# EAGLE board SparkFun_TEMT6000_Breakout-Panel-v12 (EAGLE 7.4.0), part 1 of 2
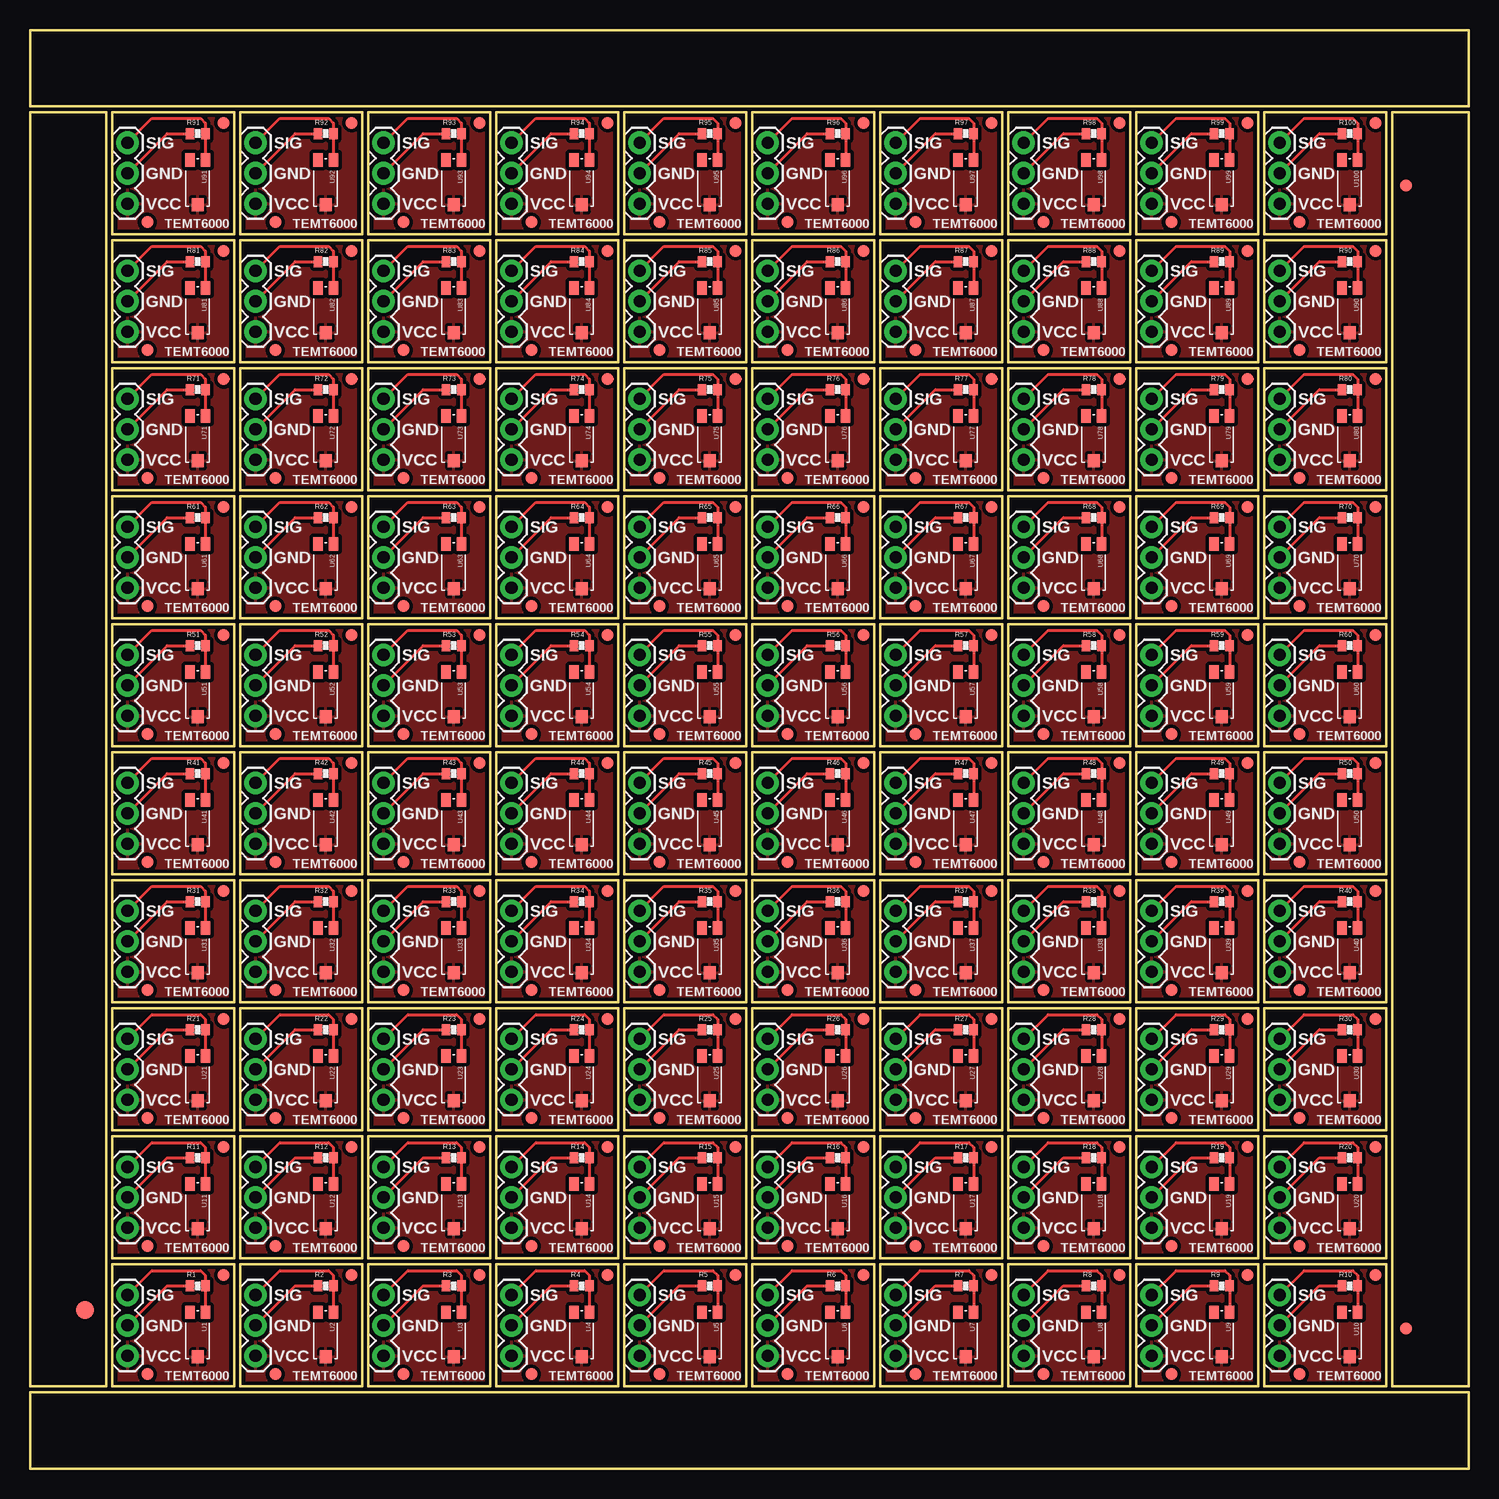
[diagram p0: board, top side]
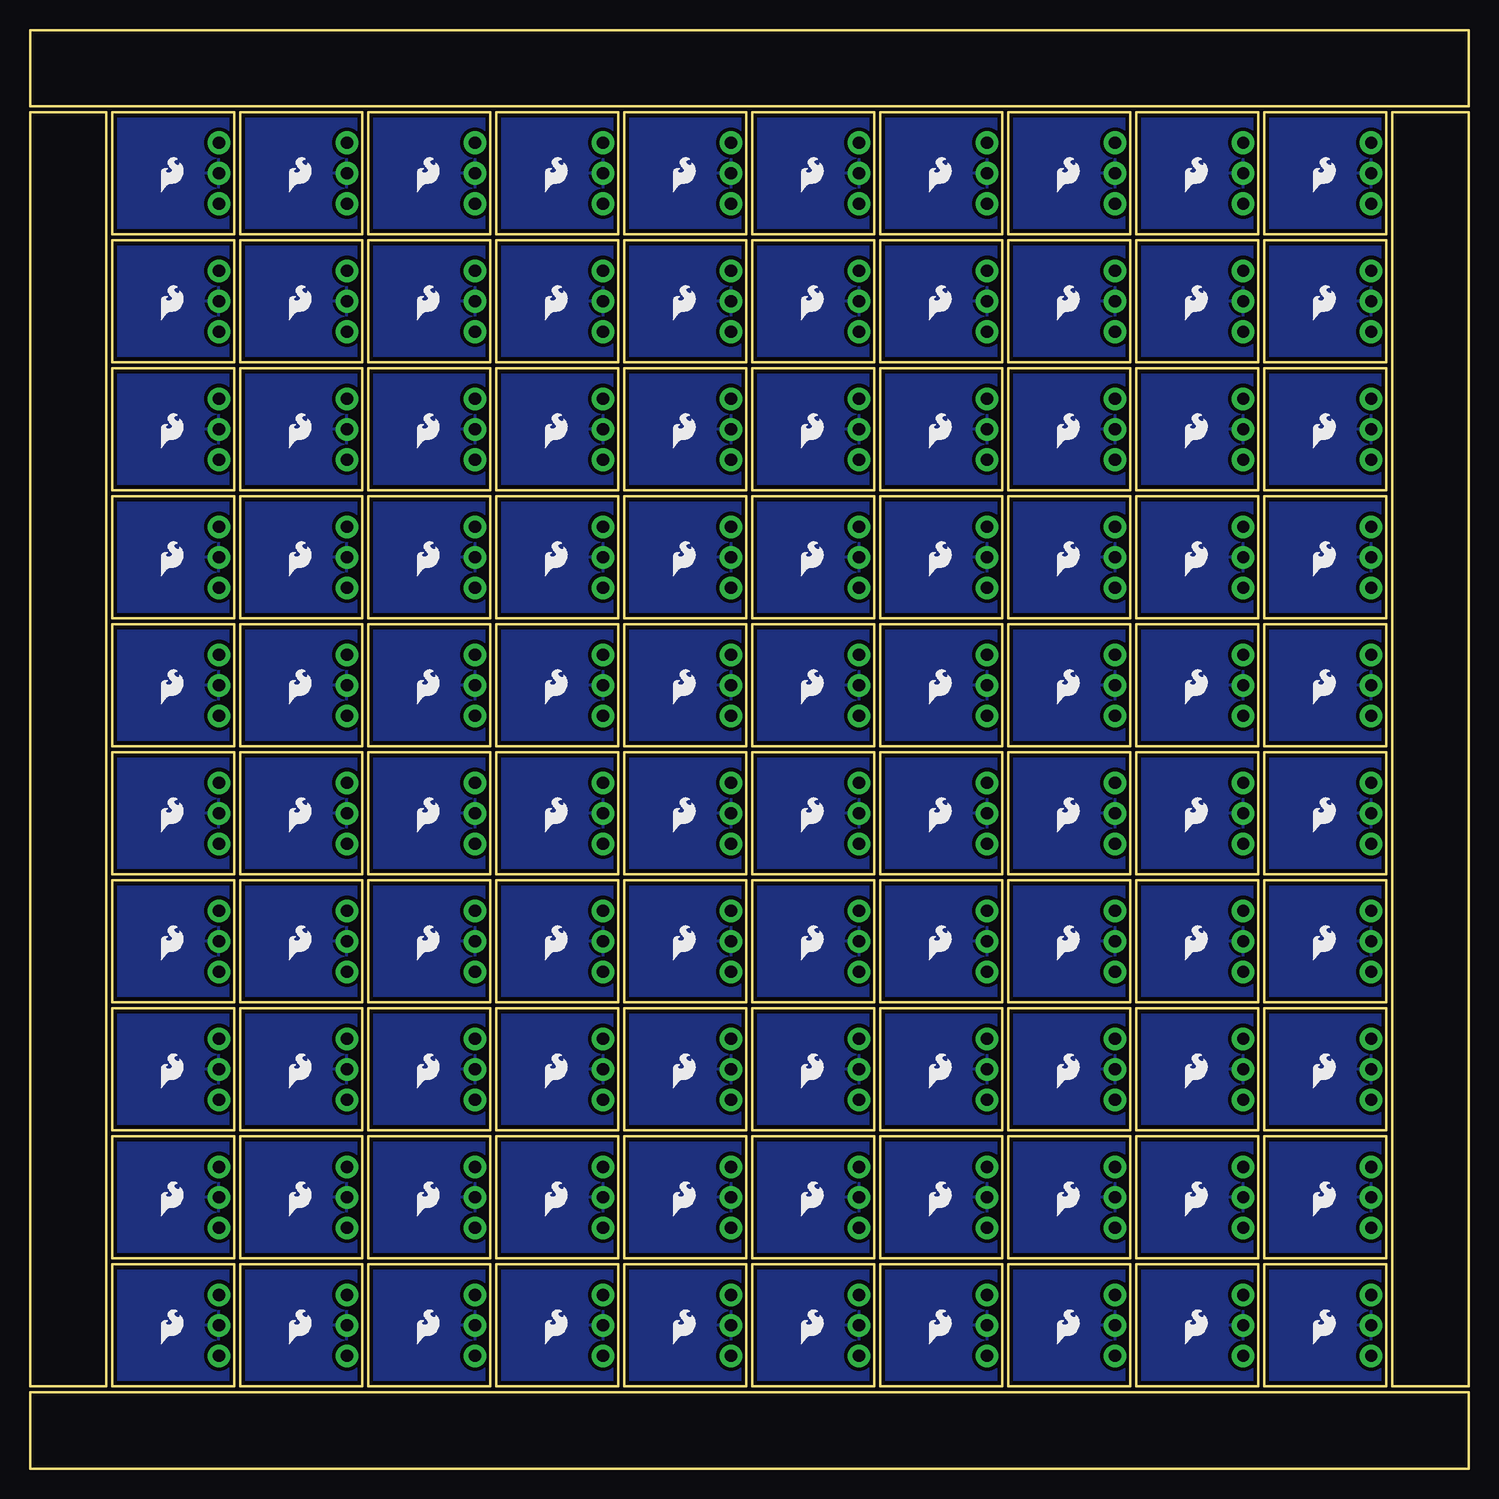
[diagram p1: board, bottom side, seen from below]

Size 119.89 x 119.89 mm. Coordinates in mm from the lower left corner, seen from the top.
Outline: 424 segments
Copper layers (1*16): Top 0.035mm / dielectric 1.5mm / Bottom 0.035mm
Design rules "SparkFun": minimum track width 8mil, minimum drill 20mil, track to track 8mil, track to pad 8mil, pad to pad 8mil, via to via 8mil, smd to smd 8mil, copper to edge 10mil, drill to drill 8mil, minimum pad ring 12mil, minimum via ring 10mil, stop-mask expansion 4mil, vias tented up to drill 20mil, thermal gap 10mil

## Footprints (pad centres in the part's own frame; a part is rotated, then mirrored left to right if it is on the bottom)
FIDUCIAL-1X2 = smd 1 x 1: 1 0,0
FIDUCIAL-1.5X3 = smd 1.5 x 1.5: 1 0,0
1X03 = drill 1.016 pad 1.88: 1 0,0; 2 2.54,0; 3 5.08,0
0402-RES = smd 0.7 x 0.9: 1 -0.65,0; 2 0.65,0
TEMT6000-SEN = smd 1.1 x 0.8: BASE -1.87,-0.65; EMITTER -1.87,0.65 | smd 1.1 x 1: COLLECTOR 1.86,0.01

## Placement (x,y rotation side)
E$1  [FIDUCIAL-1X2]  16.13,16.13 0 top
E$2  [FIDUCIAL-1X2]  9.78,7.87 0 top
E$3  [FIDUCIAL-1X2]  26.8,16.13 0 top
E$4  [FIDUCIAL-1X2]  20.45,7.87 0 top
E$5  [FIDUCIAL-1X2]  37.47,16.13 0 top
E$6  [FIDUCIAL-1X2]  31.11,7.87 0 top
E$7  [FIDUCIAL-1X2]  48.13,16.13 0 top
E$8  [FIDUCIAL-1X2]  41.78,7.87 0 top
E$9  [FIDUCIAL-1X2]  58.8,16.13 0 top
E$10  [FIDUCIAL-1X2]  52.45,7.87 0 top
E$11  [FIDUCIAL-1X2]  69.47,16.13 0 top
E$12  [FIDUCIAL-1X2]  63.12,7.87 0 top
E$13  [FIDUCIAL-1X2]  80.14,16.13 0 top
E$14  [FIDUCIAL-1X2]  73.79,7.87 0 top
E$15  [FIDUCIAL-1X2]  90.81,16.13 0 top
E$16  [FIDUCIAL-1X2]  84.45,7.87 0 top
E$17  [FIDUCIAL-1X2]  101.47,16.13 0 top
E$18  [FIDUCIAL-1X2]  95.12,7.87 0 top
E$19  [FIDUCIAL-1X2]  112.14,16.13 0 top
E$20  [FIDUCIAL-1X2]  105.79,7.87 0 top
E$21  [FIDUCIAL-1X2]  16.13,26.8 0 top
E$22  [FIDUCIAL-1X2]  9.78,18.54 0 top
E$23  [FIDUCIAL-1X2]  26.8,26.8 0 top
E$24  [FIDUCIAL-1X2]  20.45,18.54 0 top
E$25  [FIDUCIAL-1X2]  37.47,26.8 0 top
E$26  [FIDUCIAL-1X2]  31.11,18.54 0 top
E$27  [FIDUCIAL-1X2]  48.13,26.8 0 top
E$28  [FIDUCIAL-1X2]  41.78,18.54 0 top
E$29  [FIDUCIAL-1X2]  58.8,26.8 0 top
E$30  [FIDUCIAL-1X2]  52.45,18.54 0 top
E$31  [FIDUCIAL-1X2]  69.47,26.8 0 top
E$32  [FIDUCIAL-1X2]  63.12,18.54 0 top
E$33  [FIDUCIAL-1X2]  80.14,26.8 0 top
E$34  [FIDUCIAL-1X2]  73.79,18.54 0 top
E$35  [FIDUCIAL-1X2]  90.81,26.8 0 top
E$36  [FIDUCIAL-1X2]  84.45,18.54 0 top
E$37  [FIDUCIAL-1X2]  101.47,26.8 0 top
E$38  [FIDUCIAL-1X2]  95.12,18.54 0 top
E$39  [FIDUCIAL-1X2]  112.14,26.8 0 top
E$40  [FIDUCIAL-1X2]  105.79,18.54 0 top
E$41  [FIDUCIAL-1X2]  16.13,37.47 0 top
E$42  [FIDUCIAL-1X2]  9.78,29.21 0 top
E$43  [FIDUCIAL-1X2]  26.8,37.47 0 top
E$44  [FIDUCIAL-1X2]  20.45,29.21 0 top
E$45  [FIDUCIAL-1X2]  37.47,37.47 0 top
E$46  [FIDUCIAL-1X2]  31.11,29.21 0 top
E$47  [FIDUCIAL-1X2]  48.13,37.47 0 top
E$48  [FIDUCIAL-1X2]  41.78,29.21 0 top
E$49  [FIDUCIAL-1X2]  58.8,37.47 0 top
E$50  [FIDUCIAL-1X2]  52.45,29.21 0 top
E$51  [FIDUCIAL-1X2]  69.47,37.47 0 top
E$52  [FIDUCIAL-1X2]  63.12,29.21 0 top
E$53  [FIDUCIAL-1X2]  80.14,37.47 0 top
E$54  [FIDUCIAL-1X2]  73.79,29.21 0 top
E$55  [FIDUCIAL-1X2]  90.81,37.47 0 top
E$56  [FIDUCIAL-1X2]  84.45,29.21 0 top
E$57  [FIDUCIAL-1X2]  101.47,37.47 0 top
E$58  [FIDUCIAL-1X2]  95.12,29.21 0 top
E$59  [FIDUCIAL-1X2]  112.14,37.47 0 top
E$60  [FIDUCIAL-1X2]  105.79,29.21 0 top
E$61  [FIDUCIAL-1X2]  16.13,48.13 0 top
E$62  [FIDUCIAL-1X2]  9.78,39.88 0 top
E$63  [FIDUCIAL-1X2]  26.8,48.13 0 top
E$64  [FIDUCIAL-1X2]  20.45,39.88 0 top
E$65  [FIDUCIAL-1X2]  37.47,48.13 0 top
E$66  [FIDUCIAL-1X2]  31.11,39.88 0 top
E$67  [FIDUCIAL-1X2]  48.13,48.13 0 top
E$68  [FIDUCIAL-1X2]  41.78,39.88 0 top
E$69  [FIDUCIAL-1X2]  58.8,48.13 0 top
E$70  [FIDUCIAL-1X2]  52.45,39.88 0 top
E$71  [FIDUCIAL-1X2]  69.47,48.13 0 top
E$72  [FIDUCIAL-1X2]  63.12,39.88 0 top
E$73  [FIDUCIAL-1X2]  80.14,48.13 0 top
E$74  [FIDUCIAL-1X2]  73.79,39.88 0 top
E$75  [FIDUCIAL-1X2]  90.81,48.13 0 top
E$76  [FIDUCIAL-1X2]  84.45,39.88 0 top
E$77  [FIDUCIAL-1X2]  101.47,48.13 0 top
E$78  [FIDUCIAL-1X2]  95.12,39.88 0 top
E$79  [FIDUCIAL-1X2]  112.14,48.13 0 top
E$80  [FIDUCIAL-1X2]  105.79,39.88 0 top
E$81  [FIDUCIAL-1X2]  16.13,58.8 0 top
E$82  [FIDUCIAL-1X2]  9.78,50.55 0 top
E$83  [FIDUCIAL-1X2]  26.8,58.8 0 top
E$84  [FIDUCIAL-1X2]  20.45,50.55 0 top
E$85  [FIDUCIAL-1X2]  37.47,58.8 0 top
E$86  [FIDUCIAL-1X2]  31.11,50.55 0 top
E$87  [FIDUCIAL-1X2]  48.13,58.8 0 top
E$88  [FIDUCIAL-1X2]  41.78,50.55 0 top
E$89  [FIDUCIAL-1X2]  58.8,58.8 0 top
E$90  [FIDUCIAL-1X2]  52.45,50.55 0 top
E$91  [FIDUCIAL-1X2]  69.47,58.8 0 top
E$92  [FIDUCIAL-1X2]  63.12,50.55 0 top
E$93  [FIDUCIAL-1X2]  80.14,58.8 0 top
E$94  [FIDUCIAL-1X2]  73.79,50.55 0 top
E$95  [FIDUCIAL-1X2]  90.81,58.8 0 top
E$96  [FIDUCIAL-1X2]  84.45,50.55 0 top
E$97  [FIDUCIAL-1X2]  101.47,58.8 0 top
E$98  [FIDUCIAL-1X2]  95.12,50.55 0 top
E$99  [FIDUCIAL-1X2]  112.14,58.8 0 top
E$100  [FIDUCIAL-1X2]  105.79,50.55 0 top
E$101  [FIDUCIAL-1X2]  16.13,69.47 0 top
E$102  [FIDUCIAL-1X2]  9.78,61.21 0 top
E$103  [FIDUCIAL-1X2]  26.8,69.47 0 top
E$104  [FIDUCIAL-1X2]  20.45,61.21 0 top
E$105  [FIDUCIAL-1X2]  37.47,69.47 0 top
E$106  [FIDUCIAL-1X2]  31.11,61.21 0 top
E$107  [FIDUCIAL-1X2]  48.13,69.47 0 top
E$108  [FIDUCIAL-1X2]  41.78,61.21 0 top
E$109  [FIDUCIAL-1X2]  58.8,69.47 0 top
E$110  [FIDUCIAL-1X2]  52.45,61.21 0 top
E$111  [FIDUCIAL-1X2]  69.47,69.47 0 top
E$112  [FIDUCIAL-1X2]  63.12,61.21 0 top
E$113  [FIDUCIAL-1X2]  80.14,69.47 0 top
E$114  [FIDUCIAL-1X2]  73.79,61.21 0 top
E$115  [FIDUCIAL-1X2]  90.81,69.47 0 top
E$116  [FIDUCIAL-1X2]  84.45,61.21 0 top
E$117  [FIDUCIAL-1X2]  101.47,69.47 0 top
E$118  [FIDUCIAL-1X2]  95.12,61.21 0 top
E$119  [FIDUCIAL-1X2]  112.14,69.47 0 top
E$120  [FIDUCIAL-1X2]  105.79,61.21 0 top
E$121  [FIDUCIAL-1X2]  16.13,80.14 0 top
E$122  [FIDUCIAL-1X2]  9.78,71.88 0 top
E$123  [FIDUCIAL-1X2]  26.8,80.14 0 top
E$124  [FIDUCIAL-1X2]  20.45,71.88 0 top
E$125  [FIDUCIAL-1X2]  37.47,80.14 0 top
E$126  [FIDUCIAL-1X2]  31.11,71.88 0 top
E$127  [FIDUCIAL-1X2]  48.13,80.14 0 top
E$128  [FIDUCIAL-1X2]  41.78,71.88 0 top
E$129  [FIDUCIAL-1X2]  58.8,80.14 0 top
E$130  [FIDUCIAL-1X2]  52.45,71.88 0 top
E$131  [FIDUCIAL-1X2]  69.47,80.14 0 top
E$132  [FIDUCIAL-1X2]  63.12,71.88 0 top
E$133  [FIDUCIAL-1X2]  80.14,80.14 0 top
E$134  [FIDUCIAL-1X2]  73.79,71.88 0 top
E$135  [FIDUCIAL-1X2]  90.81,80.14 0 top
E$136  [FIDUCIAL-1X2]  84.45,71.88 0 top
E$137  [FIDUCIAL-1X2]  101.47,80.14 0 top
E$138  [FIDUCIAL-1X2]  95.12,71.88 0 top
E$139  [FIDUCIAL-1X2]  112.14,80.14 0 top
E$140  [FIDUCIAL-1X2]  105.79,71.88 0 top
E$141  [FIDUCIAL-1X2]  16.13,90.81 0 top
E$142  [FIDUCIAL-1X2]  9.78,82.55 0 top
E$143  [FIDUCIAL-1X2]  26.8,90.81 0 top
E$144  [FIDUCIAL-1X2]  20.45,82.55 0 top
E$145  [FIDUCIAL-1X2]  37.47,90.81 0 top
E$146  [FIDUCIAL-1X2]  31.11,82.55 0 top
E$147  [FIDUCIAL-1X2]  48.13,90.81 0 top
E$148  [FIDUCIAL-1X2]  41.78,82.55 0 top
E$149  [FIDUCIAL-1X2]  58.8,90.81 0 top
E$150  [FIDUCIAL-1X2]  52.45,82.55 0 top
E$151  [FIDUCIAL-1X2]  69.47,90.81 0 top
E$152  [FIDUCIAL-1X2]  63.12,82.55 0 top
E$153  [FIDUCIAL-1X2]  80.14,90.81 0 top
E$154  [FIDUCIAL-1X2]  73.79,82.55 0 top
E$155  [FIDUCIAL-1X2]  90.81,90.81 0 top
E$156  [FIDUCIAL-1X2]  84.45,82.55 0 top
E$157  [FIDUCIAL-1X2]  101.47,90.81 0 top
E$158  [FIDUCIAL-1X2]  95.12,82.55 0 top
E$159  [FIDUCIAL-1X2]  112.14,90.81 0 top
E$160  [FIDUCIAL-1X2]  105.79,82.55 0 top
E$161  [FIDUCIAL-1X2]  16.13,101.47 0 top
E$162  [FIDUCIAL-1X2]  9.78,93.22 0 top
E$163  [FIDUCIAL-1X2]  26.8,101.47 0 top
E$164  [FIDUCIAL-1X2]  20.45,93.22 0 top
E$165  [FIDUCIAL-1X2]  37.47,101.47 0 top
E$166  [FIDUCIAL-1X2]  31.11,93.22 0 top
E$167  [FIDUCIAL-1X2]  48.13,101.47 0 top
E$168  [FIDUCIAL-1X2]  41.78,93.22 0 top
E$169  [FIDUCIAL-1X2]  58.8,101.47 0 top
E$170  [FIDUCIAL-1X2]  52.45,93.22 0 top
E$171  [FIDUCIAL-1X2]  69.47,101.47 0 top
E$172  [FIDUCIAL-1X2]  63.12,93.22 0 top
E$173  [FIDUCIAL-1X2]  80.14,101.47 0 top
E$174  [FIDUCIAL-1X2]  73.79,93.22 0 top
E$175  [FIDUCIAL-1X2]  90.81,101.47 0 top
E$176  [FIDUCIAL-1X2]  84.45,93.22 0 top
E$177  [FIDUCIAL-1X2]  101.47,101.47 0 top
E$178  [FIDUCIAL-1X2]  95.12,93.22 0 top
E$179  [FIDUCIAL-1X2]  112.14,101.47 0 top
E$180  [FIDUCIAL-1X2]  105.79,93.22 0 top
E$181  [FIDUCIAL-1X2]  16.13,112.14 0 top
E$182  [FIDUCIAL-1X2]  9.78,103.89 0 top
E$183  [FIDUCIAL-1X2]  26.8,112.14 0 top
E$184  [FIDUCIAL-1X2]  20.45,103.89 0 top
E$185  [FIDUCIAL-1X2]  37.47,112.14 0 top
E$186  [FIDUCIAL-1X2]  31.11,103.89 0 top
E$187  [FIDUCIAL-1X2]  48.13,112.14 0 top
E$188  [FIDUCIAL-1X2]  41.78,103.89 0 top
E$189  [FIDUCIAL-1X2]  58.8,112.14 0 top
E$190  [FIDUCIAL-1X2]  52.45,103.89 0 top
E$191  [FIDUCIAL-1X2]  69.47,112.14 0 top
E$192  [FIDUCIAL-1X2]  63.12,103.89 0 top
E$193  [FIDUCIAL-1X2]  80.14,112.14 0 top
E$194  [FIDUCIAL-1X2]  73.79,103.89 0 top
E$195  [FIDUCIAL-1X2]  90.81,112.14 0 top
E$196  [FIDUCIAL-1X2]  84.45,103.89 0 top
E$197  [FIDUCIAL-1X2]  101.47,112.14 0 top
E$198  [FIDUCIAL-1X2]  95.12,103.89 0 top
E$199  [FIDUCIAL-1X2]  112.14,112.14 0 top
E$200  [FIDUCIAL-1X2]  105.79,103.89 0 top
E$201  [FIDUCIAL-1.5X3]  4.57,13.21 0 top
E$205  [FIDUCIAL-1X2]  114.68,11.68 0 top
E$206  [FIDUCIAL-1X2]  114.68,106.93 180 top
JP1  [1X03]  18.8,9.4 90 top
JP2  [1X03]  29.46,9.4 90 top
JP3  [1X03]  40.13,9.4 90 top
JP4  [1X03]  8.13,9.4 90 top
JP5  [1X03]  50.8,9.4 90 top
JP6  [1X03]  61.47,9.4 90 top
JP7  [1X03]  72.14,9.4 90 top
JP8  [1X03]  82.8,9.4 90 top
JP9  [1X03]  93.47,9.4 90 top
JP10  [1X03]  104.14,9.4 90 top
JP11  [1X03]  8.13,20.07 90 top
JP12  [1X03]  18.8,20.07 90 top
JP13  [1X03]  29.46,20.07 90 top
JP14  [1X03]  40.13,20.07 90 top
JP15  [1X03]  50.8,20.07 90 top
JP16  [1X03]  61.47,20.07 90 top
JP17  [1X03]  72.14,20.07 90 top
JP18  [1X03]  82.8,20.07 90 top
JP19  [1X03]  93.47,20.07 90 top
JP20  [1X03]  104.14,20.07 90 top
JP21  [1X03]  8.13,30.73 90 top
JP22  [1X03]  18.8,30.73 90 top
JP23  [1X03]  29.46,30.73 90 top
JP24  [1X03]  40.13,30.73 90 top
JP25  [1X03]  50.8,30.73 90 top
JP26  [1X03]  61.47,30.73 90 top
JP27  [1X03]  72.14,30.73 90 top
JP28  [1X03]  82.8,30.73 90 top
JP29  [1X03]  93.47,30.73 90 top
JP30  [1X03]  104.14,30.73 90 top
JP31  [1X03]  8.13,41.4 90 top
JP32  [1X03]  18.8,41.4 90 top
JP33  [1X03]  29.46,41.4 90 top
JP34  [1X03]  40.13,41.4 90 top
JP35  [1X03]  50.8,41.4 90 top
JP36  [1X03]  61.47,41.4 90 top
JP37  [1X03]  72.14,41.4 90 top
JP38  [1X03]  82.8,41.4 90 top
JP39  [1X03]  93.47,41.4 90 top
JP40  [1X03]  104.14,41.4 90 top
JP41  [1X03]  8.13,52.07 90 top
JP42  [1X03]  18.8,52.07 90 top
JP43  [1X03]  29.46,52.07 90 top
JP44  [1X03]  40.13,52.07 90 top
JP45  [1X03]  50.8,52.07 90 top
JP46  [1X03]  61.47,52.07 90 top
JP47  [1X03]  72.14,52.07 90 top
JP48  [1X03]  82.8,52.07 90 top
JP49  [1X03]  93.47,52.07 90 top
JP50  [1X03]  104.14,52.07 90 top
JP51  [1X03]  8.13,62.74 90 top
JP52  [1X03]  18.8,62.74 90 top
JP53  [1X03]  29.46,62.74 90 top
JP54  [1X03]  40.13,62.74 90 top
JP55  [1X03]  50.8,62.74 90 top
JP56  [1X03]  61.47,62.74 90 top
JP57  [1X03]  72.14,62.74 90 top
JP58  [1X03]  82.8,62.74 90 top
JP59  [1X03]  93.47,62.74 90 top
JP60  [1X03]  104.14,62.74 90 top
JP61  [1X03]  8.13,73.41 90 top
JP62  [1X03]  18.8,73.41 90 top
JP63  [1X03]  29.46,73.41 90 top
JP64  [1X03]  40.13,73.41 90 top
JP65  [1X03]  50.8,73.41 90 top
JP66  [1X03]  61.47,73.41 90 top
JP67  [1X03]  72.14,73.41 90 top
JP68  [1X03]  82.8,73.41 90 top
JP69  [1X03]  93.47,73.41 90 top
JP70  [1X03]  104.14,73.41 90 top
JP71  [1X03]  8.13,84.07 90 top
JP72  [1X03]  18.8,84.07 90 top
JP73  [1X03]  29.46,84.07 90 top
JP74  [1X03]  40.13,84.07 90 top
JP75  [1X03]  50.8,84.07 90 top
JP76  [1X03]  61.47,84.07 90 top
JP77  [1X03]  72.14,84.07 90 top
JP78  [1X03]  82.8,84.07 90 top
JP79  [1X03]  93.47,84.07 90 top
JP80  [1X03]  104.14,84.07 90 top
JP81  [1X03]  8.13,94.74 90 top
JP82  [1X03]  18.8,94.74 90 top
JP83  [1X03]  29.46,94.74 90 top
JP84  [1X03]  40.13,94.74 90 top
JP85  [1X03]  50.8,94.74 90 top
JP86  [1X03]  61.47,94.74 90 top
JP87  [1X03]  72.14,94.74 90 top
JP88  [1X03]  82.8,94.74 90 top
JP89  [1X03]  93.47,94.74 90 top
JP90  [1X03]  104.14,94.74 90 top
JP91  [1X03]  8.13,105.41 90 top
JP92  [1X03]  18.8,105.41 90 top
JP93  [1X03]  29.46,105.41 90 top
JP94  [1X03]  40.13,105.41 90 top
JP95  [1X03]  50.8,105.41 90 top
JP96  [1X03]  61.47,105.41 90 top
JP97  [1X03]  72.14,105.41 90 top
JP98  [1X03]  82.8,105.41 90 top
JP99  [1X03]  93.47,105.41 90 top
JP100  [1X03]  104.14,105.41 90 top
R1  10K  [0402-RES]  13.97,15.24 0 top
R2  10K  [0402-RES]  24.64,15.24 0 top
R3  10K  [0402-RES]  35.31,15.24 0 top
R4  10K  [0402-RES]  45.97,15.24 0 top
R5  10K  [0402-RES]  56.64,15.24 0 top
R6  10K  [0402-RES]  67.31,15.24 0 top
R7  10K  [0402-RES]  77.98,15.24 0 top
R8  10K  [0402-RES]  88.65,15.24 0 top
R9  10K  [0402-RES]  99.31,15.24 0 top
R10  10K  [0402-RES]  109.98,15.24 0 top
R11  10K  [0402-RES]  13.97,25.91 0 top
R12  10K  [0402-RES]  24.64,25.91 0 top
R13  10K  [0402-RES]  35.31,25.91 0 top
R14  10K  [0402-RES]  45.97,25.91 0 top
R15  10K  [0402-RES]  56.64,25.91 0 top
R16  10K  [0402-RES]  67.31,25.91 0 top
R17  10K  [0402-RES]  77.98,25.91 0 top
R18  10K  [0402-RES]  88.65,25.91 0 top
R19  10K  [0402-RES]  99.31,25.91 0 top
R20  10K  [0402-RES]  109.98,25.91 0 top
R21  10K  [0402-RES]  13.97,36.58 0 top
R22  10K  [0402-RES]  24.64,36.58 0 top
R23  10K  [0402-RES]  35.31,36.58 0 top
R24  10K  [0402-RES]  45.97,36.58 0 top
R25  10K  [0402-RES]  56.64,36.58 0 top
R26  10K  [0402-RES]  67.31,36.58 0 top
R27  10K  [0402-RES]  77.98,36.58 0 top
R28  10K  [0402-RES]  88.65,36.58 0 top
R29  10K  [0402-RES]  99.31,36.58 0 top
R30  10K  [0402-RES]  109.98,36.58 0 top
R31  10K  [0402-RES]  13.97,47.24 0 top
R32  10K  [0402-RES]  24.64,47.24 0 top
R33  10K  [0402-RES]  35.31,47.24 0 top
R34  10K  [0402-RES]  45.97,47.24 0 top
R35  10K  [0402-RES]  56.64,47.24 0 top
R36  10K  [0402-RES]  67.31,47.24 0 top
R37  10K  [0402-RES]  77.98,47.24 0 top
R38  10K  [0402-RES]  88.65,47.24 0 top
R39  10K  [0402-RES]  99.31,47.24 0 top
R40  10K  [0402-RES]  109.98,47.24 0 top
R41  10K  [0402-RES]  13.97,57.91 0 top
R42  10K  [0402-RES]  24.64,57.91 0 top
R43  10K  [0402-RES]  35.31,57.91 0 top
R44  10K  [0402-RES]  45.97,57.91 0 top
R45  10K  [0402-RES]  56.64,57.91 0 top
R46  10K  [0402-RES]  67.31,57.91 0 top
R47  10K  [0402-RES]  77.98,57.91 0 top
R48  10K  [0402-RES]  88.65,57.91 0 top
R49  10K  [0402-RES]  99.31,57.91 0 top
R50  10K  [0402-RES]  109.98,57.91 0 top
R51  10K  [0402-RES]  13.97,68.58 0 top
R52  10K  [0402-RES]  24.64,68.58 0 top
R53  10K  [0402-RES]  35.31,68.58 0 top
R54  10K  [0402-RES]  45.97,68.58 0 top
R55  10K  [0402-RES]  56.64,68.58 0 top
R56  10K  [0402-RES]  67.31,68.58 0 top
R57  10K  [0402-RES]  77.98,68.58 0 top
R58  10K  [0402-RES]  88.65,68.58 0 top
R59  10K  [0402-RES]  99.31,68.58 0 top
R60  10K  [0402-RES]  109.98,68.58 0 top
R61  10K  [0402-RES]  13.97,79.25 0 top
R62  10K  [0402-RES]  24.64,79.25 0 top
R63  10K  [0402-RES]  35.31,79.25 0 top
R64  10K  [0402-RES]  45.97,79.25 0 top
R65  10K  [0402-RES]  56.64,79.25 0 top
R66  10K  [0402-RES]  67.31,79.25 0 top
R67  10K  [0402-RES]  77.98,79.25 0 top
R68  10K  [0402-RES]  88.65,79.25 0 top
R69  10K  [0402-RES]  99.31,79.25 0 top
R70  10K  [0402-RES]  109.98,79.25 0 top
R71  10K  [0402-RES]  13.97,89.92 0 top
R72  10K  [0402-RES]  24.64,89.92 0 top
R73  10K  [0402-RES]  35.31,89.92 0 top
R74  10K  [0402-RES]  45.97,89.92 0 top
R75  10K  [0402-RES]  56.64,89.92 0 top
R76  10K  [0402-RES]  67.31,89.92 0 top
R77  10K  [0402-RES]  77.98,89.92 0 top
R78  10K  [0402-RES]  88.65,89.92 0 top
R79  10K  [0402-RES]  99.31,89.92 0 top
R80  10K  [0402-RES]  109.98,89.92 0 top
R81  10K  [0402-RES]  13.97,100.58 0 top
R82  10K  [0402-RES]  24.64,100.58 0 top
R83  10K  [0402-RES]  35.31,100.58 0 top
R84  10K  [0402-RES]  45.97,100.58 0 top
R85  10K  [0402-RES]  56.64,100.58 0 top
R86  10K  [0402-RES]  67.31,100.58 0 top
R87  10K  [0402-RES]  77.98,100.58 0 top
R88  10K  [0402-RES]  88.65,100.58 0 top
R89  10K  [0402-RES]  99.31,100.58 0 top
R90  10K  [0402-RES]  109.98,100.58 0 top
R91  10K  [0402-RES]  13.97,111.25 0 top
R92  10K  [0402-RES]  24.64,111.25 0 top
R93  10K  [0402-RES]  35.31,111.25 0 top
R94  10K  [0402-RES]  45.97,111.25 0 top
R95  10K  [0402-RES]  56.64,111.25 0 top
R96  10K  [0402-RES]  67.31,111.25 0 top
R97  10K  [0402-RES]  77.98,111.25 0 top
R98  10K  [0402-RES]  88.65,111.25 0 top
R99  10K  [0402-RES]  99.31,111.25 0 top
R100  10K  [0402-RES]  109.98,111.25 0 top
U1  TEMT6000  [TEMT6000-SEN]  13.97,11.18 270 top
U2  TEMT6000  [TEMT6000-SEN]  24.64,11.18 270 top
U3  TEMT6000  [TEMT6000-SEN]  35.31,11.18 270 top
U4  TEMT6000  [TEMT6000-SEN]  45.97,11.18 270 top
U5  TEMT6000  [TEMT6000-SEN]  56.64,11.18 270 top
U6  TEMT6000  [TEMT6000-SEN]  67.31,11.18 270 top
U7  TEMT6000  [TEMT6000-SEN]  77.98,11.18 270 top
U8  TEMT6000  [TEMT6000-SEN]  88.65,11.18 270 top
U9  TEMT6000  [TEMT6000-SEN]  99.31,11.18 270 top
U10  TEMT6000  [TEMT6000-SEN]  109.98,11.18 270 top
U11  TEMT6000  [TEMT6000-SEN]  13.97,21.84 270 top
U12  TEMT6000  [TEMT6000-SEN]  24.64,21.84 270 top
U13  TEMT6000  [TEMT6000-SEN]  35.31,21.84 270 top
U14  TEMT6000  [TEMT6000-SEN]  45.97,21.84 270 top
U15  TEMT6000  [TEMT6000-SEN]  56.64,21.84 270 top
U16  TEMT6000  [TEMT6000-SEN]  67.31,21.84 270 top
U17  TEMT6000  [TEMT6000-SEN]  77.98,21.84 270 top
U18  TEMT6000  [TEMT6000-SEN]  88.65,21.84 270 top
U19  TEMT6000  [TEMT6000-SEN]  99.31,21.84 270 top
U20  TEMT6000  [TEMT6000-SEN]  109.98,21.84 270 top
U21  TEMT6000  [TEMT6000-SEN]  13.97,32.51 270 top
U22  TEMT6000  [TEMT6000-SEN]  24.64,32.51 270 top
U23  TEMT6000  [TEMT6000-SEN]  35.31,32.51 270 top
U24  TEMT6000  [TEMT6000-SEN]  45.97,32.51 270 top
U25  TEMT6000  [TEMT6000-SEN]  56.64,32.51 270 top
U26  TEMT6000  [TEMT6000-SEN]  67.31,32.51 270 top
U27  TEMT6000  [TEMT6000-SEN]  77.98,32.51 270 top
U28  TEMT6000  [TEMT6000-SEN]  88.65,32.51 270 top
U29  TEMT6000  [TEMT6000-SEN]  99.31,32.51 270 top
U30  TEMT6000  [TEMT6000-SEN]  109.98,32.51 270 top
U31  TEMT6000  [TEMT6000-SEN]  13.97,43.18 270 top
U32  TEMT6000  [TEMT6000-SEN]  24.64,43.18 270 top
U33  TEMT6000  [TEMT6000-SEN]  35.31,43.18 270 top
U34  TEMT6000  [TEMT6000-SEN]  45.97,43.18 270 top
U35  TEMT6000  [TEMT6000-SEN]  56.64,43.18 270 top
U36  TEMT6000  [TEMT6000-SEN]  67.31,43.18 270 top
U37  TEMT6000  [TEMT6000-SEN]  77.98,43.18 270 top
U38  TEMT6000  [TEMT6000-SEN]  88.65,43.18 270 top
U39  TEMT6000  [TEMT6000-SEN]  99.31,43.18 270 top
U40  TEMT6000  [TEMT6000-SEN]  109.98,43.18 270 top
U41  TEMT6000  [TEMT6000-SEN]  13.97,53.85 270 top
U42  TEMT6000  [TEMT6000-SEN]  24.64,53.85 270 top
U43  TEMT6000  [TEMT6000-SEN]  35.31,53.85 270 top
U44  TEMT6000  [TEMT6000-SEN]  45.97,53.85 270 top
U45  TEMT6000  [TEMT6000-SEN]  56.64,53.85 270 top
U46  TEMT6000  [TEMT6000-SEN]  67.31,53.85 270 top
U47  TEMT6000  [TEMT6000-SEN]  77.98,53.85 270 top
U48  TEMT6000  [TEMT6000-SEN]  88.65,53.85 270 top
U49  TEMT6000  [TEMT6000-SEN]  99.31,53.85 270 top
U50  TEMT6000  [TEMT6000-SEN]  109.98,53.85 270 top
U51  TEMT6000  [TEMT6000-SEN]  13.97,64.52 270 top
U52  TEMT6000  [TEMT6000-SEN]  24.64,64.52 270 top
U53  TEMT6000  [TEMT6000-SEN]  35.31,64.52 270 top
U54  TEMT6000  [TEMT6000-SEN]  45.97,64.52 270 top
U55  TEMT6000  [TEMT6000-SEN]  56.64,64.52 270 top
U56  TEMT6000  [TEMT6000-SEN]  67.31,64.52 270 top
U57  TEMT6000  [TEMT6000-SEN]  77.98,64.52 270 top
U58  TEMT6000  [TEMT6000-SEN]  88.65,64.52 270 top
U59  TEMT6000  [TEMT6000-SEN]  99.31,64.52 270 top
U60  TEMT6000  [TEMT6000-SEN]  109.98,64.52 270 top
U61  TEMT6000  [TEMT6000-SEN]  13.97,75.18 270 top
U62  TEMT6000  [TEMT6000-SEN]  24.64,75.18 270 top
U63  TEMT6000  [TEMT6000-SEN]  35.31,75.18 270 top
U64  TEMT6000  [TEMT6000-SEN]  45.97,75.18 270 top
U65  TEMT6000  [TEMT6000-SEN]  56.64,75.18 270 top
U66  TEMT6000  [TEMT6000-SEN]  67.31,75.18 270 top
U67  TEMT6000  [TEMT6000-SEN]  77.98,75.18 270 top
U68  TEMT6000  [TEMT6000-SEN]  88.65,75.18 270 top
U69  TEMT6000  [TEMT6000-SEN]  99.31,75.18 270 top
U70  TEMT6000  [TEMT6000-SEN]  109.98,75.18 270 top
U71  TEMT6000  [TEMT6000-SEN]  13.97,85.85 270 top
U72  TEMT6000  [TEMT6000-SEN]  24.64,85.85 270 top
U73  TEMT6000  [TEMT6000-SEN]  35.31,85.85 270 top
U74  TEMT6000  [TEMT6000-SEN]  45.97,85.85 270 top
U75  TEMT6000  [TEMT6000-SEN]  56.64,85.85 270 top
U76  TEMT6000  [TEMT6000-SEN]  67.31,85.85 270 top
U77  TEMT6000  [TEMT6000-SEN]  77.98,85.85 270 top
U78  TEMT6000  [TEMT6000-SEN]  88.65,85.85 270 top
U79  TEMT6000  [TEMT6000-SEN]  99.31,85.85 270 top
U80  TEMT6000  [TEMT6000-SEN]  109.98,85.85 270 top
U81  TEMT6000  [TEMT6000-SEN]  13.97,96.52 270 top
U82  TEMT6000  [TEMT6000-SEN]  24.64,96.52 270 top
U83  TEMT6000  [TEMT6000-SEN]  35.31,96.52 270 top
U84  TEMT6000  [TEMT6000-SEN]  45.97,96.52 270 top
U85  TEMT6000  [TEMT6000-SEN]  56.64,96.52 270 top
U86  TEMT6000  [TEMT6000-SEN]  67.31,96.52 270 top
U87  TEMT6000  [TEMT6000-SEN]  77.98,96.52 270 top
U88  TEMT6000  [TEMT6000-SEN]  88.65,96.52 270 top
U89  TEMT6000  [TEMT6000-SEN]  99.31,96.52 270 top
U90  TEMT6000  [TEMT6000-SEN]  109.98,96.52 270 top
U91  TEMT6000  [TEMT6000-SEN]  13.97,107.19 270 top
U92  TEMT6000  [TEMT6000-SEN]  24.64,107.19 270 top
U93  TEMT6000  [TEMT6000-SEN]  35.31,107.19 270 top
U94  TEMT6000  [TEMT6000-SEN]  45.97,107.19 270 top
U95  TEMT6000  [TEMT6000-SEN]  56.64,107.19 270 top
U96  TEMT6000  [TEMT6000-SEN]  67.31,107.19 270 top
U97  TEMT6000  [TEMT6000-SEN]  77.98,107.19 270 top
U98  TEMT6000  [TEMT6000-SEN]  88.65,107.19 270 top
U99  TEMT6000  [TEMT6000-SEN]  99.31,107.19 270 top
U100  TEMT6000  [TEMT6000-SEN]  109.98,107.19 270 top
U$1  LOGO-SFESK  [SFE-LOGO-FLAME]  12.95,10.41 0 bottom
U$2  LOGO-SFESK  [SFE-LOGO-FLAME]  23.62,10.41 0 bottom
U$3  LOGO-SFESK  [SFE-LOGO-FLAME]  34.29,10.41 0 bottom
U$4  LOGO-SFESK  [SFE-LOGO-FLAME]  44.96,10.41 0 bottom
U$5  LOGO-SFESK  [SFE-LOGO-FLAME]  55.63,10.41 0 bottom
U$6  LOGO-SFESK  [SFE-LOGO-FLAME]  66.29,10.41 0 bottom
U$7  LOGO-SFESK  [SFE-LOGO-FLAME]  76.96,10.41 0 bottom
U$8  LOGO-SFESK  [SFE-LOGO-FLAME]  87.63,10.41 0 bottom
U$9  LOGO-SFESK  [SFE-LOGO-FLAME]  98.3,10.41 0 bottom
U$10  LOGO-SFESK  [SFE-LOGO-FLAME]  108.97,10.41 0 bottom
U$11  LOGO-SFESK  [SFE-LOGO-FLAME]  12.95,21.08 0 bottom
U$12  LOGO-SFESK  [SFE-LOGO-FLAME]  23.62,21.08 0 bottom
U$13  LOGO-SFESK  [SFE-LOGO-FLAME]  34.29,21.08 0 bottom
U$14  LOGO-SFESK  [SFE-LOGO-FLAME]  44.96,21.08 0 bottom
U$15  LOGO-SFESK  [SFE-LOGO-FLAME]  55.63,21.08 0 bottom
U$16  LOGO-SFESK  [SFE-LOGO-FLAME]  66.29,21.08 0 bottom
U$17  LOGO-SFESK  [SFE-LOGO-FLAME]  76.96,21.08 0 bottom
U$18  LOGO-SFESK  [SFE-LOGO-FLAME]  87.63,21.08 0 bottom
U$19  LOGO-SFESK  [SFE-LOGO-FLAME]  98.3,21.08 0 bottom
U$20  LOGO-SFESK  [SFE-LOGO-FLAME]  108.97,21.08 0 bottom
U$21  LOGO-SFESK  [SFE-LOGO-FLAME]  12.95,31.75 0 bottom
U$22  LOGO-SFESK  [SFE-LOGO-FLAME]  23.62,31.75 0 bottom
U$23  LOGO-SFESK  [SFE-LOGO-FLAME]  34.29,31.75 0 bottom
U$24  LOGO-SFESK  [SFE-LOGO-FLAME]  44.96,31.75 0 bottom
U$25  LOGO-SFESK  [SFE-LOGO-FLAME]  55.63,31.75 0 bottom
U$26  LOGO-SFESK  [SFE-LOGO-FLAME]  66.29,31.75 0 bottom
U$27  LOGO-SFESK  [SFE-LOGO-FLAME]  76.96,31.75 0 bottom
U$28  LOGO-SFESK  [SFE-LOGO-FLAME]  87.63,31.75 0 bottom
U$29  LOGO-SFESK  [SFE-LOGO-FLAME]  98.3,31.75 0 bottom
U$30  LOGO-SFESK  [SFE-LOGO-FLAME]  108.97,31.75 0 bottom
U$31  LOGO-SFESK  [SFE-LOGO-FLAME]  12.95,42.42 0 bottom
U$32  LOGO-SFESK  [SFE-LOGO-FLAME]  23.62,42.42 0 bottom
U$33  LOGO-SFESK  [SFE-LOGO-FLAME]  34.29,42.42 0 bottom
U$34  LOGO-SFESK  [SFE-LOGO-FLAME]  44.96,42.42 0 bottom
U$35  LOGO-SFESK  [SFE-LOGO-FLAME]  55.63,42.42 0 bottom
U$36  LOGO-SFESK  [SFE-LOGO-FLAME]  66.29,42.42 0 bottom
U$37  LOGO-SFESK  [SFE-LOGO-FLAME]  76.96,42.42 0 bottom
U$38  LOGO-SFESK  [SFE-LOGO-FLAME]  87.63,42.42 0 bottom
U$39  LOGO-SFESK  [SFE-LOGO-FLAME]  98.3,42.42 0 bottom
U$40  LOGO-SFESK  [SFE-LOGO-FLAME]  108.97,42.42 0 bottom
U$41  LOGO-SFESK  [SFE-LOGO-FLAME]  12.95,53.09 0 bottom
U$42  LOGO-SFESK  [SFE-LOGO-FLAME]  23.62,53.09 0 bottom
U$43  LOGO-SFESK  [SFE-LOGO-FLAME]  34.29,53.09 0 bottom
U$44  LOGO-SFESK  [SFE-LOGO-FLAME]  44.96,53.09 0 bottom
U$45  LOGO-SFESK  [SFE-LOGO-FLAME]  55.63,53.09 0 bottom
U$46  LOGO-SFESK  [SFE-LOGO-FLAME]  66.29,53.09 0 bottom
U$47  LOGO-SFESK  [SFE-LOGO-FLAME]  76.96,53.09 0 bottom
U$48  LOGO-SFESK  [SFE-LOGO-FLAME]  87.63,53.09 0 bottom
U$49  LOGO-SFESK  [SFE-LOGO-FLAME]  98.3,53.09 0 bottom
U$50  LOGO-SFESK  [SFE-LOGO-FLAME]  108.97,53.09 0 bottom
U$51  LOGO-SFESK  [SFE-LOGO-FLAME]  12.95,63.75 0 bottom
U$52  LOGO-SFESK  [SFE-LOGO-FLAME]  23.62,63.75 0 bottom
U$53  LOGO-SFESK  [SFE-LOGO-FLAME]  34.29,63.75 0 bottom
U$54  LOGO-SFESK  [SFE-LOGO-FLAME]  44.96,63.75 0 bottom
U$55  LOGO-SFESK  [SFE-LOGO-FLAME]  55.63,63.75 0 bottom
U$56  LOGO-SFESK  [SFE-LOGO-FLAME]  66.29,63.75 0 bottom
U$57  LOGO-SFESK  [SFE-LOGO-FLAME]  76.96,63.75 0 bottom
U$58  LOGO-SFESK  [SFE-LOGO-FLAME]  87.63,63.75 0 bottom
U$59  LOGO-SFESK  [SFE-LOGO-FLAME]  98.3,63.75 0 bottom
U$60  LOGO-SFESK  [SFE-LOGO-FLAME]  108.97,63.75 0 bottom
U$61  LOGO-SFESK  [SFE-LOGO-FLAME]  12.95,74.42 0 bottom
U$62  LOGO-SFESK  [SFE-LOGO-FLAME]  23.62,74.42 0 bottom
U$63  LOGO-SFESK  [SFE-LOGO-FLAME]  34.29,74.42 0 bottom
U$64  LOGO-SFESK  [SFE-LOGO-FLAME]  44.96,74.42 0 bottom
U$65  LOGO-SFESK  [SFE-LOGO-FLAME]  55.63,74.42 0 bottom
U$66  LOGO-SFESK  [SFE-LOGO-FLAME]  66.29,74.42 0 bottom
U$67  LOGO-SFESK  [SFE-LOGO-FLAME]  76.96,74.42 0 bottom
U$68  LOGO-SFESK  [SFE-LOGO-FLAME]  87.63,74.42 0 bottom
U$69  LOGO-SFESK  [SFE-LOGO-FLAME]  98.3,74.42 0 bottom
U$70  LOGO-SFESK  [SFE-LOGO-FLAME]  108.97,74.42 0 bottom
U$71  LOGO-SFESK  [SFE-LOGO-FLAME]  12.95,85.09 0 bottom
U$72  LOGO-SFESK  [SFE-LOGO-FLAME]  23.62,85.09 0 bottom
U$73  LOGO-SFESK  [SFE-LOGO-FLAME]  34.29,85.09 0 bottom
U$74  LOGO-SFESK  [SFE-LOGO-FLAME]  44.96,85.09 0 bottom
U$75  LOGO-SFESK  [SFE-LOGO-FLAME]  55.63,85.09 0 bottom
U$76  LOGO-SFESK  [SFE-LOGO-FLAME]  66.29,85.09 0 bottom
U$77  LOGO-SFESK  [SFE-LOGO-FLAME]  76.96,85.09 0 bottom
U$78  LOGO-SFESK  [SFE-LOGO-FLAME]  87.63,85.09 0 bottom
U$79  LOGO-SFESK  [SFE-LOGO-FLAME]  98.3,85.09 0 bottom
U$80  LOGO-SFESK  [SFE-LOGO-FLAME]  108.97,85.09 0 bottom
U$81  LOGO-SFESK  [SFE-LOGO-FLAME]  12.95,95.76 0 bottom
U$82  LOGO-SFESK  [SFE-LOGO-FLAME]  23.62,95.76 0 bottom
U$83  LOGO-SFESK  [SFE-LOGO-FLAME]  34.29,95.76 0 bottom
U$84  LOGO-SFESK  [SFE-LOGO-FLAME]  44.96,95.76 0 bottom
U$85  LOGO-SFESK  [SFE-LOGO-FLAME]  55.63,95.76 0 bottom
U$86  LOGO-SFESK  [SFE-LOGO-FLAME]  66.29,95.76 0 bottom
U$87  LOGO-SFESK  [SFE-LOGO-FLAME]  76.96,95.76 0 bottom
U$88  LOGO-SFESK  [SFE-LOGO-FLAME]  87.63,95.76 0 bottom
U$89  LOGO-SFESK  [SFE-LOGO-FLAME]  98.3,95.76 0 bottom
U$90  LOGO-SFESK  [SFE-LOGO-FLAME]  108.97,95.76 0 bottom
U$91  LOGO-SFESK  [SFE-LOGO-FLAME]  12.95,106.43 0 bottom
U$92  LOGO-SFESK  [SFE-LOGO-FLAME]  23.62,106.43 0 bottom
U$93  LOGO-SFESK  [SFE-LOGO-FLAME]  34.29,106.43 0 bottom
U$94  LOGO-SFESK  [SFE-LOGO-FLAME]  44.96,106.43 0 bottom
U$95  LOGO-SFESK  [SFE-LOGO-FLAME]  55.63,106.43 0 bottom
U$96  LOGO-SFESK  [SFE-LOGO-FLAME]  66.29,106.43 0 bottom
U$97  LOGO-SFESK  [SFE-LOGO-FLAME]  76.96,106.43 0 bottom
U$98  LOGO-SFESK  [SFE-LOGO-FLAME]  87.63,106.43 0 bottom
U$99  LOGO-SFESK  [SFE-LOGO-FLAME]  98.3,106.43 0 bottom
U$100  LOGO-SFESK  [SFE-LOGO-FLAME]  108.97,106.43 0 bottom

## Library data of the parts
E$1-E$200 JP1-JP100 R1-R100 U1-U100 U$1-U$100 = SparkFun
E$201 = SparkFun-Retired
E$205 E$206 = SparkFun-Aesthetics

## Nets
GND: JP4.2 R1.1
GND1: JP1.2 R2.1
GND2: JP2.2 R3.1
GND3: JP3.2 R4.1
GND4: JP5.2 R5.1
GND5: JP6.2 R6.1
GND6: JP7.2 R7.1
GND7: JP8.2 R8.1
GND8: JP9.2 R9.1
GND9: JP10.2 R10.1
GND10: JP11.2 R11.1
GND11: JP12.2 R12.1
GND12: JP13.2 R13.1
GND13: JP14.2 R14.1
GND14: JP15.2 R15.1
GND15: JP16.2 R16.1
GND16: JP17.2 R17.1
GND17: JP18.2 R18.1
GND18: JP19.2 R19.1
GND19: JP20.2 R20.1
GND20: JP21.2 R21.1
GND21: JP22.2 R22.1
GND22: JP23.2 R23.1
GND23: JP24.2 R24.1
GND24: JP25.2 R25.1
GND25: JP26.2 R26.1
GND26: JP27.2 R27.1
GND27: JP28.2 R28.1
GND28: JP29.2 R29.1
GND29: JP30.2 R30.1
GND30: JP31.2 R31.1
GND31: JP32.2 R32.1
GND32: JP33.2 R33.1
GND33: JP34.2 R34.1
GND34: JP35.2 R35.1
GND35: JP36.2 R36.1
GND36: JP37.2 R37.1
GND37: JP38.2 R38.1
GND38: JP39.2 R39.1
GND39: JP40.2 R40.1
GND40: JP41.2 R41.1
GND41: JP42.2 R42.1
GND42: JP43.2 R43.1
GND43: JP44.2 R44.1
GND44: JP45.2 R45.1
GND45: JP46.2 R46.1
GND46: JP47.2 R47.1
GND47: JP48.2 R48.1
GND48: JP49.2 R49.1
GND49: JP50.2 R50.1
GND50: JP51.2 R51.1
GND51: JP52.2 R52.1
GND52: JP53.2 R53.1
GND53: JP54.2 R54.1
GND54: JP55.2 R55.1
GND55: JP56.2 R56.1
GND56: JP57.2 R57.1
GND57: JP58.2 R58.1
GND58: JP59.2 R59.1
GND59: JP60.2 R60.1
GND60: JP61.2 R61.1
GND61: JP62.2 R62.1
GND62: JP63.2 R63.1
GND63: JP64.2 R64.1
GND64: JP65.2 R65.1
GND65: JP66.2 R66.1
GND66: JP67.2 R67.1
GND67: JP68.2 R68.1
GND68: JP69.2 R69.1
GND69: JP70.2 R70.1
GND70: JP71.2 R71.1
GND71: JP72.2 R72.1
GND72: JP73.2 R73.1
GND73: JP74.2 R74.1
GND74: JP75.2 R75.1
GND75: JP76.2 R76.1
GND76: JP77.2 R77.1
GND77: JP78.2 R78.1
GND78: JP79.2 R79.1
GND79: JP80.2 R80.1
GND80: JP81.2 R81.1
GND81: JP82.2 R82.1
GND82: JP83.2 R83.1
GND83: JP84.2 R84.1
GND84: JP85.2 R85.1
GND85: JP86.2 R86.1
GND86: JP87.2 R87.1
GND87: JP88.2 R88.1
GND88: JP89.2 R89.1
GND89: JP90.2 R90.1
GND90: JP91.2 R91.1
GND91: JP92.2 R92.1
GND92: JP93.2 R93.1
GND93: JP94.2 R94.1
GND94: JP95.2 R95.1
GND95: JP96.2 R96.1
GND96: JP97.2 R97.1
GND97: JP98.2 R98.1
GND98: JP99.2 R99.1
GND99: JP100.2 R100.1
S: JP4.3 R1.2 U1.EMITTER
S1: JP1.3 R2.2 U2.EMITTER
S2: JP2.3 R3.2 U3.EMITTER
S3: JP3.3 R4.2 U4.EMITTER
S4: JP5.3 R5.2 U5.EMITTER
S5: JP6.3 R6.2 U6.EMITTER
S6: JP7.3 R7.2 U7.EMITTER
S7: JP8.3 R8.2 U8.EMITTER
S8: JP9.3 R9.2 U9.EMITTER
S9: JP10.3 R10.2 U10.EMITTER
S10: JP11.3 R11.2 U11.EMITTER
S11: JP12.3 R12.2 U12.EMITTER
S12: JP13.3 R13.2 U13.EMITTER
S13: JP14.3 R14.2 U14.EMITTER
S14: JP15.3 R15.2 U15.EMITTER
S15: JP16.3 R16.2 U16.EMITTER
S16: JP17.3 R17.2 U17.EMITTER
S17: JP18.3 R18.2 U18.EMITTER
S18: JP19.3 R19.2 U19.EMITTER
S19: JP20.3 R20.2 U20.EMITTER
S20: JP21.3 R21.2 U21.EMITTER
S21: JP22.3 R22.2 U22.EMITTER
S22: JP23.3 R23.2 U23.EMITTER
S23: JP24.3 R24.2 U24.EMITTER
S24: JP25.3 R25.2 U25.EMITTER
S25: JP26.3 R26.2 U26.EMITTER
S26: JP27.3 R27.2 U27.EMITTER
S27: JP28.3 R28.2 U28.EMITTER
S28: JP29.3 R29.2 U29.EMITTER
S29: JP30.3 R30.2 U30.EMITTER
S30: JP31.3 R31.2 U31.EMITTER
S31: JP32.3 R32.2 U32.EMITTER
S32: JP33.3 R33.2 U33.EMITTER
S33: JP34.3 R34.2 U34.EMITTER
S34: JP35.3 R35.2 U35.EMITTER
S35: JP36.3 R36.2 U36.EMITTER
S36: JP37.3 R37.2 U37.EMITTER
S37: JP38.3 R38.2 U38.EMITTER
S38: JP39.3 R39.2 U39.EMITTER
S39: JP40.3 R40.2 U40.EMITTER
S40: JP41.3 R41.2 U41.EMITTER
S41: JP42.3 R42.2 U42.EMITTER
S42: JP43.3 R43.2 U43.EMITTER
S43: JP44.3 R44.2 U44.EMITTER
S44: JP45.3 R45.2 U45.EMITTER
S45: JP46.3 R46.2 U46.EMITTER
S46: JP47.3 R47.2 U47.EMITTER
S47: JP48.3 R48.2 U48.EMITTER
S48: JP49.3 R49.2 U49.EMITTER
S49: JP50.3 R50.2 U50.EMITTER
S50: JP51.3 R51.2 U51.EMITTER
S51: JP52.3 R52.2 U52.EMITTER
S52: JP53.3 R53.2 U53.EMITTER
S53: JP54.3 R54.2 U54.EMITTER
S54: JP55.3 R55.2 U55.EMITTER
S55: JP56.3 R56.2 U56.EMITTER
S56: JP57.3 R57.2 U57.EMITTER
S57: JP58.3 R58.2 U58.EMITTER
S58: JP59.3 R59.2 U59.EMITTER
S59: JP60.3 R60.2 U60.EMITTER
S60: JP61.3 R61.2 U61.EMITTER
S61: JP62.3 R62.2 U62.EMITTER
S62: JP63.3 R63.2 U63.EMITTER
S63: JP64.3 R64.2 U64.EMITTER
S64: JP65.3 R65.2 U65.EMITTER
S65: JP66.3 R66.2 U66.EMITTER
S66: JP67.3 R67.2 U67.EMITTER
S67: JP68.3 R68.2 U68.EMITTER
S68: JP69.3 R69.2 U69.EMITTER
S69: JP70.3 R70.2 U70.EMITTER
S70: JP71.3 R71.2 U71.EMITTER
S71: JP72.3 R72.2 U72.EMITTER
S72: JP73.3 R73.2 U73.EMITTER
S73: JP74.3 R74.2 U74.EMITTER
S74: JP75.3 R75.2 U75.EMITTER
S75: JP76.3 R76.2 U76.EMITTER
S76: JP77.3 R77.2 U77.EMITTER
S77: JP78.3 R78.2 U78.EMITTER
S78: JP79.3 R79.2 U79.EMITTER
S79: JP80.3 R80.2 U80.EMITTER
S80: JP81.3 R81.2 U81.EMITTER
S81: JP82.3 R82.2 U82.EMITTER
S82: JP83.3 R83.2 U83.EMITTER
S83: JP84.3 R84.2 U84.EMITTER
S84: JP85.3 R85.2 U85.EMITTER
S85: JP86.3 R86.2 U86.EMITTER
S86: JP87.3 R87.2 U87.EMITTER
S87: JP88.3 R88.2 U88.EMITTER
S88: JP89.3 R89.2 U89.EMITTER
S89: JP90.3 R90.2 U90.EMITTER
S90: JP91.3 R91.2 U91.EMITTER
S91: JP92.3 R92.2 U92.EMITTER
S92: JP93.3 R93.2 U93.EMITTER
S93: JP94.3 R94.2 U94.EMITTER
S94: JP95.3 R95.2 U95.EMITTER
S95: JP96.3 R96.2 U96.EMITTER
S96: JP97.3 R97.2 U97.EMITTER
S97: JP98.3 R98.2 U98.EMITTER
S98: JP99.3 R99.2 U99.EMITTER
S99: JP100.3 R100.2 U100.EMITTER
VCC: JP4.1 U1.COLLECTOR
VCC1: JP1.1 U2.COLLECTOR
VCC2: JP2.1 U3.COLLECTOR
VCC3: JP3.1 U4.COLLECTOR
VCC4: JP5.1 U5.COLLECTOR
VCC5: JP6.1 U6.COLLECTOR
VCC6: JP7.1 U7.COLLECTOR
VCC7: JP8.1 U8.COLLECTOR
VCC8: JP9.1 U9.COLLECTOR
VCC9: JP10.1 U10.COLLECTOR
VCC10: JP11.1 U11.COLLECTOR
VCC11: JP12.1 U12.COLLECTOR
VCC12: JP13.1 U13.COLLECTOR
VCC13: JP14.1 U14.COLLECTOR
VCC14: JP15.1 U15.COLLECTOR
VCC15: JP16.1 U16.COLLECTOR
VCC16: JP17.1 U17.COLLECTOR
VCC17: JP18.1 U18.COLLECTOR
VCC18: JP19.1 U19.COLLECTOR
VCC19: JP20.1 U20.COLLECTOR
VCC20: JP21.1 U21.COLLECTOR
VCC21: JP22.1 U22.COLLECTOR
VCC22: JP23.1 U23.COLLECTOR
VCC23: JP24.1 U24.COLLECTOR
VCC24: JP25.1 U25.COLLECTOR
VCC25: JP26.1 U26.COLLECTOR
VCC26: JP27.1 U27.COLLECTOR
VCC27: JP28.1 U28.COLLECTOR
VCC28: JP29.1 U29.COLLECTOR
VCC29: JP30.1 U30.COLLECTOR
VCC30: JP31.1 U31.COLLECTOR
VCC31: JP32.1 U32.COLLECTOR
VCC32: JP33.1 U33.COLLECTOR
VCC33: JP34.1 U34.COLLECTOR
VCC34: JP35.1 U35.COLLECTOR
VCC35: JP36.1 U36.COLLECTOR
VCC36: JP37.1 U37.COLLECTOR
VCC37: JP38.1 U38.COLLECTOR
VCC38: JP39.1 U39.COLLECTOR
VCC39: JP40.1 U40.COLLECTOR
VCC40: JP41.1 U41.COLLECTOR
VCC41: JP42.1 U42.COLLECTOR
VCC42: JP43.1 U43.COLLECTOR
VCC43: JP44.1 U44.COLLECTOR
VCC44: JP45.1 U45.COLLECTOR
VCC45: JP46.1 U46.COLLECTOR
VCC46: JP47.1 U47.COLLECTOR
VCC47: JP48.1 U48.COLLECTOR
VCC48: JP49.1 U49.COLLECTOR
VCC49: JP50.1 U50.COLLECTOR
VCC50: JP51.1 U51.COLLECTOR
VCC51: JP52.1 U52.COLLECTOR
VCC52: JP53.1 U53.COLLECTOR
VCC53: JP54.1 U54.COLLECTOR
VCC54: JP55.1 U55.COLLECTOR
VCC55: JP56.1 U56.COLLECTOR
VCC56: JP57.1 U57.COLLECTOR
VCC57: JP58.1 U58.COLLECTOR
VCC58: JP59.1 U59.COLLECTOR
VCC59: JP60.1 U60.COLLECTOR
VCC60: JP61.1 U61.COLLECTOR
VCC61: JP62.1 U62.COLLECTOR
VCC62: JP63.1 U63.COLLECTOR
VCC63: JP64.1 U64.COLLECTOR
VCC64: JP65.1 U65.COLLECTOR
VCC65: JP66.1 U66.COLLECTOR
VCC66: JP67.1 U67.COLLECTOR
VCC67: JP68.1 U68.COLLECTOR
VCC68: JP69.1 U69.COLLECTOR
VCC69: JP70.1 U70.COLLECTOR
VCC70: JP71.1 U71.COLLECTOR
VCC71: JP72.1 U72.COLLECTOR
VCC72: JP73.1 U73.COLLECTOR
VCC73: JP74.1 U74.COLLECTOR
VCC74: JP75.1 U75.COLLECTOR
VCC75: JP76.1 U76.COLLECTOR
VCC76: JP77.1 U77.COLLECTOR
VCC77: JP78.1 U78.COLLECTOR
VCC78: JP79.1 U79.COLLECTOR
VCC79: JP80.1 U80.COLLECTOR
VCC80: JP81.1 U81.COLLECTOR
VCC81: JP82.1 U82.COLLECTOR
VCC82: JP83.1 U83.COLLECTOR
VCC83: JP84.1 U84.COLLECTOR
VCC84: JP85.1 U85.COLLECTOR
VCC85: JP86.1 U86.COLLECTOR
VCC86: JP87.1 U87.COLLECTOR
VCC87: JP88.1 U88.COLLECTOR
VCC88: JP89.1 U89.COLLECTOR
VCC89: JP90.1 U90.COLLECTOR
VCC90: JP91.1 U91.COLLECTOR
VCC91: JP92.1 U92.COLLECTOR
VCC92: JP93.1 U93.COLLECTOR
VCC93: JP94.1 U94.COLLECTOR
VCC94: JP95.1 U95.COLLECTOR
VCC95: JP96.1 U96.COLLECTOR
VCC96: JP97.1 U97.COLLECTOR
VCC97: JP98.1 U98.COLLECTOR
VCC98: JP99.1 U99.COLLECTOR
VCC99: JP100.1 U100.COLLECTOR